# Altium PCB ASIC-Board.PcbDoc
Units mm, origin at the board's own origin, x right, y up, seen from the top; angles counter-clockwise.
Board outline 63 x 51 mm, 2 copper layers (Top Layer, Bottom Layer), stack 1.62 mm thick; 32 components, 24 nets, 136 pads, 62 vias.
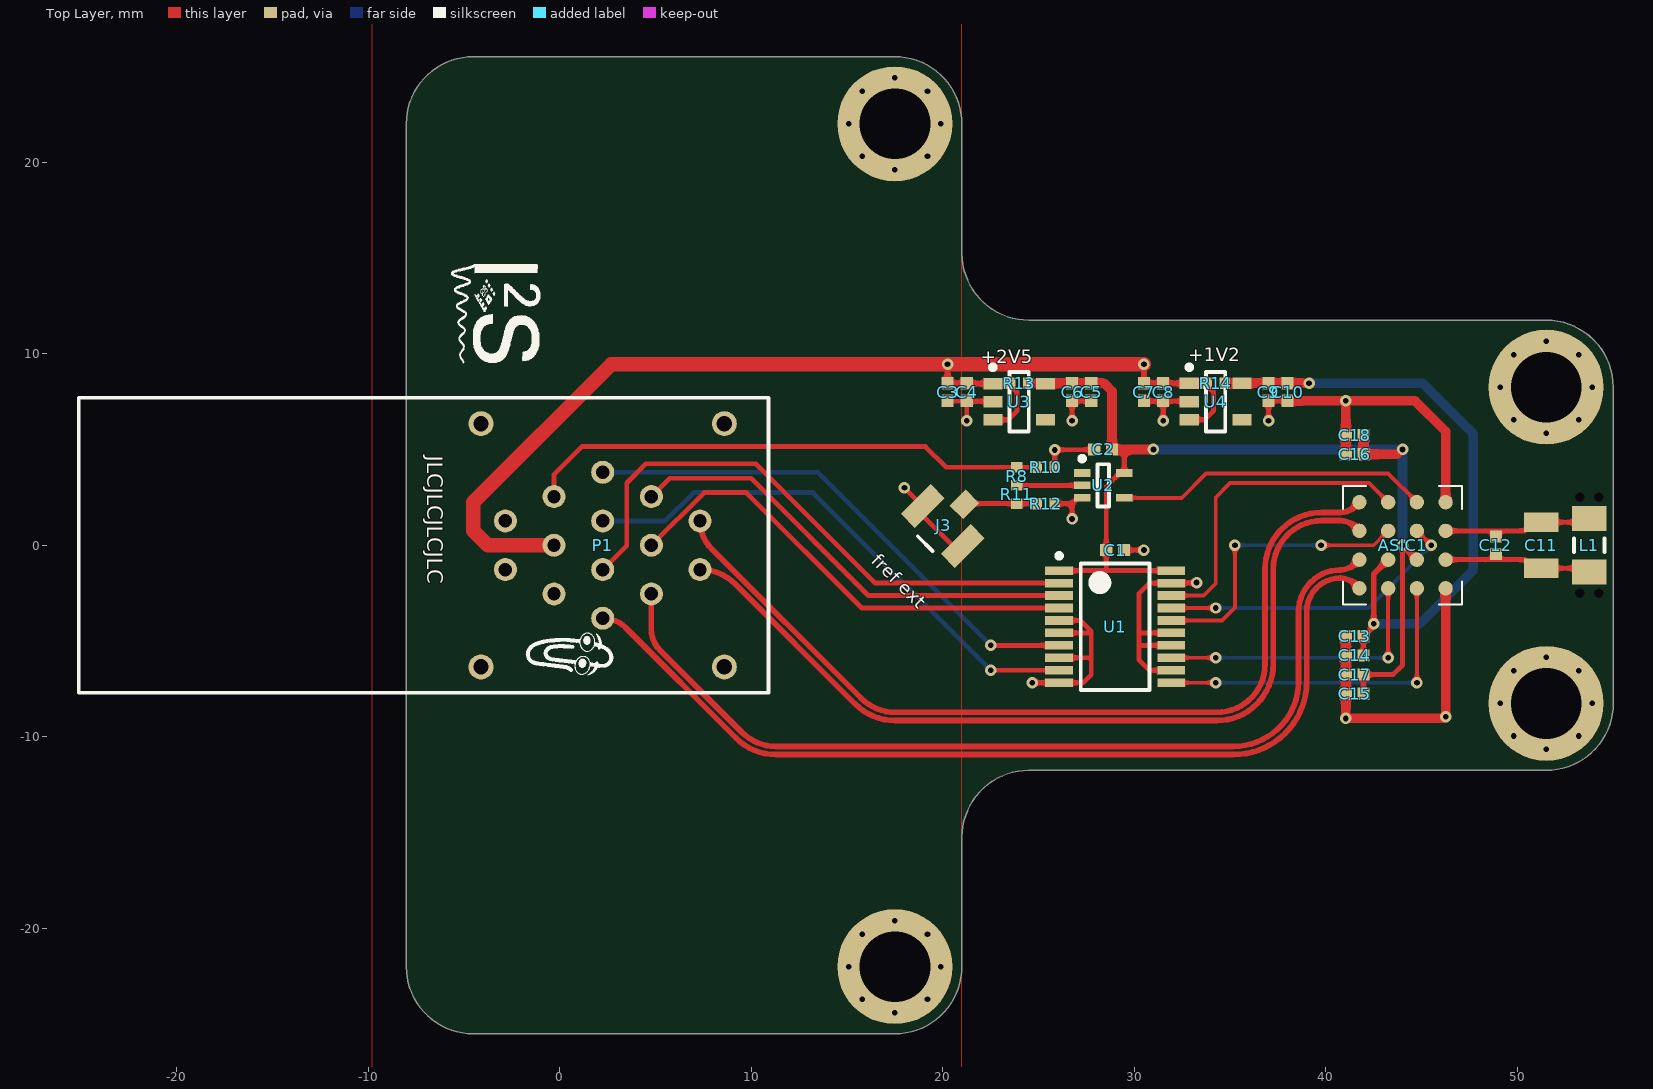
[diagram p0: Top Layer view]
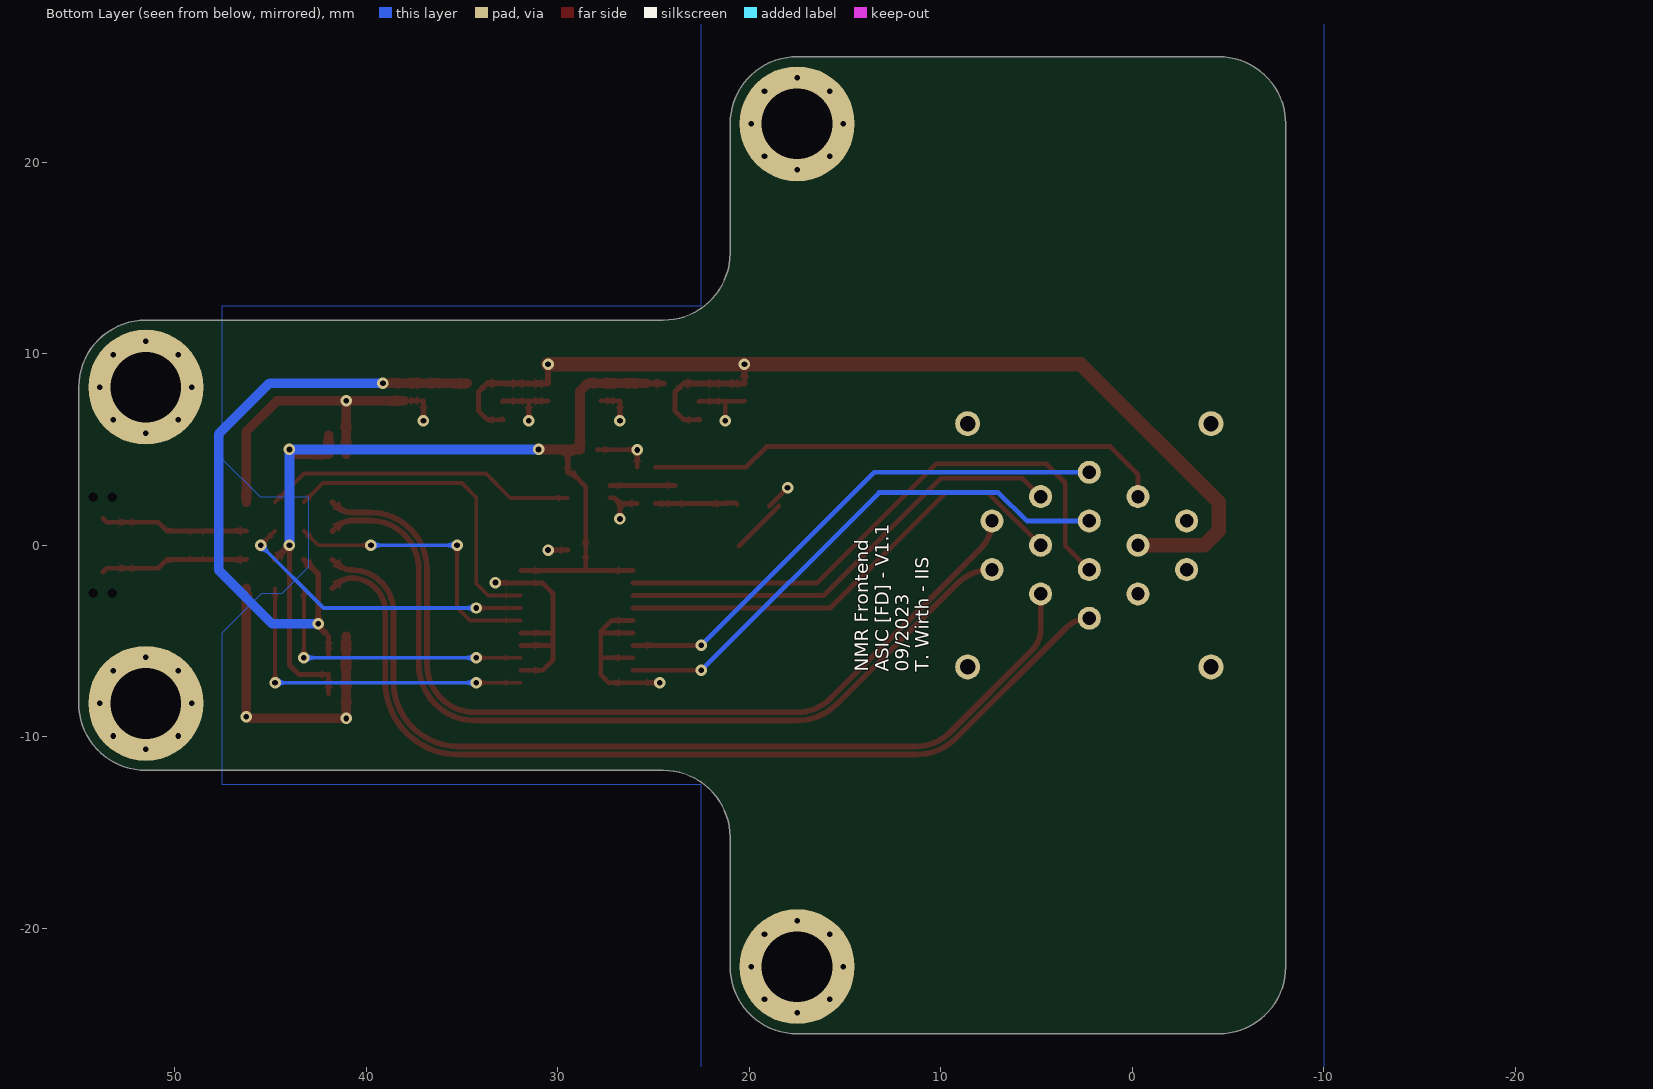
[diagram p1: Bottom Layer view, seen from below]
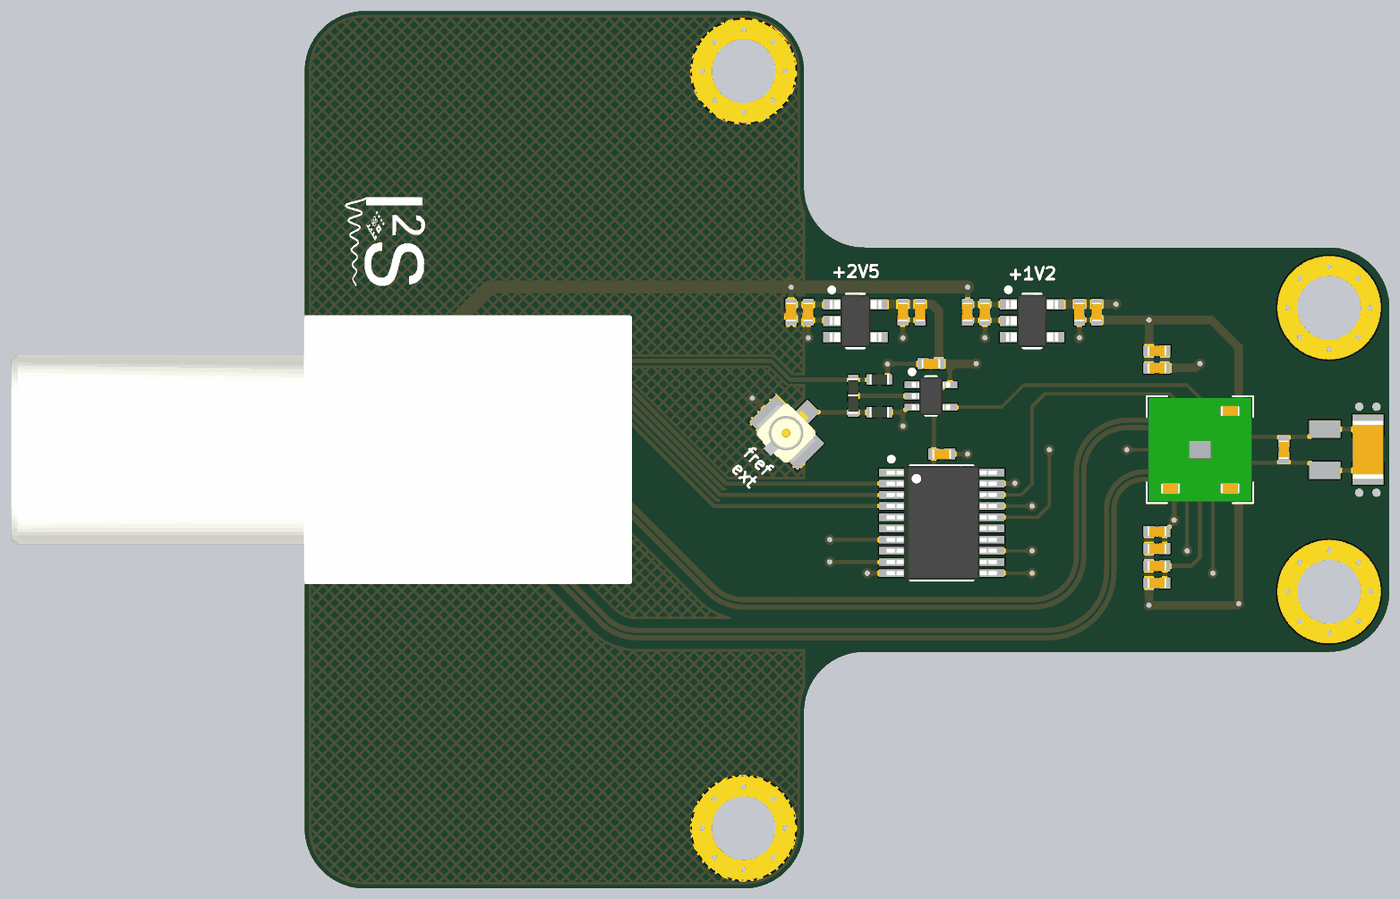
[diagram p2: 3D render of the assembled board from above, using the file's embedded part models]

## Layer stack, top to bottom
Top Solder: solder mask 0.01, Solder Resist, Dk 3.5
Top Layer: signal copper 0.035
Dielectric 1: dielectric 1.55, FR-4, Dk 4.8
Bottom Layer: signal copper 0.035
Bottom Solder: solder mask 0.01, Solder Resist, Dk 3.5

## Board outline
-4.5,-25.5 cw(c-4.5,-22) -8,-22 -8,22 cw(c-4.5,22) -4.5,25.5 17.5,25.5 cw(c17.5,22) 21,22 21,15.75 21,15.25 ccw(c24.5,15.25) 24.5,11.75 51.5,11.75 cw(c51.5,8.25) 55,8.25 55,-8.25 cw(c51.5,-8.25) 51.5,-11.75 24.5,-11.75 ccw(c24.5,-15.25) 21,-15.25 21,-15.75 21,-22 cw(c17.5,-22) 17.5,-25.5

## Design rules (kind name [scope] priority, off if disabled: settings)
BoardOutlineClearance [All] p1: gap=0.2 ignorepadtopadclearanceinfootprint=FALSE
Clearance Clearance_IQ [InNetClass('Diffnets')] p1: gap=0.127 ignorepadtopadclearanceinfootprint=FALSE except(0.25: Arc-Hole Track-Hole SMDPad-Hole THPad-Hole Via-Hole Fill-Hole Poly-Hole Region-Hole Text-Hole; 0.5: Arc-Poly Track-Poly SMDPad-Poly THPad-Poly Via-Poly)
Clearance [All] p2: gap=0.127 ignorepadtopadclearanceinfootprint=FALSE except(0.25: Arc-Hole Track-Hole SMDPad-Hole THPad-Hole Via-Hole Fill-Hole Poly-Hole Region-Hole Text-Hole)
ComponentClearance [All] p1: gap=0.127 collisioncheckmode=3 verticalgap=0.127 showdistances=TRUE
DiffPairsRouting DiffPairsRouting_IQ [InDifferentialPairClass('IQ')] p1: maxlimit=0.254 minlimit=0.127 mostfreqgap=0.127 toplayer_minwidth=0.127 toplayer_maxwidth=25.4 toplayer_prefwidth=0.3 bottomlayer_minwidth=0.127 bottomlayer_maxwidth=25.4 bottomlayer_prefwidth=0.3 maxuncoupledlength=12.7
DiffPairsRouting [All] p2: maxlimit=0.254 minlimit=0.127 mostfreqgap=0.127 toplayer_minwidth=0.127 toplayer_maxwidth=25.4 toplayer_prefwidth=0.127 bottomlayer_minwidth=0.127 bottomlayer_maxwidth=25.4 bottomlayer_prefwidth=0.127 maxuncoupledlength=12.7
Height [All] p1: minheight=0 maxheight=1816.048 prefheight=12.7
HoleSize [All] p1: absolutevalues=TRUE maxlimit=6.3 minlimit=0.3 maxpercent=80.000 minpercent=20.000
HoleToHoleClearance [All] p1: gap=0.25 allowstackedmicrovias=FALSE
MinimumAnnularRing [All] p1: minimumring=0.076
MinimumSolderMaskSliver [All] p1: minsoldermaskwidth=0
PlaneClearance [All] p1: clearance=0.2
PlaneConnect PlaneConnectPowerPads [InPadClass('PowerPads')] p1: planeconnectstyle=Direct reliefexpansion=0.508 reliefentries=4 reliefconductorwidth=0.254 reliefairgap=0.254
PlaneConnect [All] p2: planeconnectstyle=Direct reliefexpansion=0.3 reliefentries=4 reliefconductorwidth=0.127 reliefairgap=0.127
PolygonConnect PolygonConnectPowerPads [All vs (InPadClass('PowerPads'))] p1: connectstyle=Direct reliefconductorwidth=0.254 reliefentries=4 polygonreliefangle="90 Angle" airgapwidth=0.254
PolygonConnect [All] p2: connectstyle=Direct reliefconductorwidth=0.127 reliefentries=4 polygonreliefangle="90 Angle" airgapwidth=0.127
RoutingVias [All] p1: holewidth=0.3 width=0.6 viastyle="Through Hole" minholewidth=0.3 minwidth=0.6 maxholewidth=0.6 maxwidth=6.6
SilkToSilkClearance [All] p1: silktosilkclearance=0
SilkToSolderMaskClearance [IsPad] p1: minsilkscreentomaskgap=0.127 clearancetoexposedcopper=TRUE
SolderMaskExpansion [All] p1: expansion=0.075 istentingtop=FALSE
Width [All] p1: maxlimit=25.4 minlimit=0.127 preferedwidth=0.127 minimp=50.000000 maximp=50.000000 favimp=50.000000
20 further rules are at their usual default settings.

## Classes and differential pairs
net class Diffnets: I_N I_P Q_N Q_P
differential pair class IQ: I Q
component class U_Power: C3 C4 C5 C6 C7 C8 C9 C10 R13 R14 U3 U4
component class U_ASIC: ASIC1 C11 C12 C13 C14 C15 C16 C17 C18 L1
component class ASIC-Board: C1 C2 J3 P1 R8 R10 R11 R12 U1 U2
differential pair Q: +Q_P -Q_N
differential pair I: +I_P -I_N

## Components (designator, comment, footprint, x,y, rotation, side; value= is the part's Value field where it differs from the comment)
ASIC1 "NMR-Transceiver-v2_FD2020" NMR-Transceiver-FD2020_Interposer-BGA 44,0 r180 top
C1 "100n" CAP_0402 29,-0.25 r0 top
C2 "100n" CAP_0402 28.375,5 r180 top
C3 "1u" CAP_0402 20.25,8 r270 top
C4 "100n" CAP_0402 21.25,8 r270 top
C5 "100n" CAP_0402 27.75,8 r270 top
C6 "1u" CAP_0402 26.75,8 r270 top
C7 "1u" CAP_0402 30.5,8 r270 top
C8 "100n" CAP_0402 31.5,8 r270 top
C9 "100n" CAP_0402 37,8 r270 top
C10 "1u" CAP_0402 38,8 r270 top
C11 "JR500" Cap_var 51.25,-0.15 r90 top
C12 "Ct" CAP_0402 48.875,0 r90 top
C13 "100n" CAP_0402 41.5,-4.75 r180 top
C14 "1n" CAP_0402 41.5,-5.75 r180 top
C15 "1n" CAP_0402 41.5,-7.75 r180 top
C16 "1n" CAP_0402 41.5,4.75 r180 top
C17 "100n" CAP_0402 41.5,-6.75 r180 top
C18 "100n" CAP_0402 41.5,5.75 r180 top
J3 "U.FL" U.FL 20,1 r45 top
L1 "solenoid" Ind_1206 53.75,0 r90 top
P1 "EPG.1B.314.NLN" EPG.1B.314.NLN 2.25,0 r180 top
R8 "0 | inf" RES_0402 23.875,3.6 r90 top value="0 [] inf"
R10 "69R8" RES_0402 25.375,4.075 r180 top
R11 "0 | inf" RES_0402 23.875,2.65 r270 top value="0 [] inf"
R12 "49R9" RES_0402 25.375,2.175 r180 top
R13 "0" RES_0402 24,8.45 r0 top
R14 "0" RES_0402 34.25,8.45 r0 top
U1 "BusTransceiver" TSSOP-20 29,-4.25 r0 top
U2 "NC7SV04P5X" SOT23-65P210X110-5N 28.375,3.125 r0 top
U3 "LDLN025M25R" SOT23-95P280X145-5N 23.99,7.49 r0 top
U4 "LDLN025M12R" SOT23-95P280X145-5N 34.245,7.495 r0 top

## Footprints (in the part's own frame and the unit in brackets; to place one, negate y for a bottom-side part, rotate by r counter-clockwise, add the part's x,y. Pads: shape width x height; smd on the part's side, far side on the other; paste and mask are expansions set on the pad)
CAP_0402 [mm] "Chip Capacitor, 2-Leads, Body 1,00x0,50mm, IPC Medium Density"
  rect 0.64x0.64 smd: 1(-0.46,0) 2(0.46,0)
  body extent -0.55,-0.3 0.55,0.3, height 0.6
Cap_var [mm]
  rect 1x1.8 smd mask+0.102: 1(-1.05,0) 2(1.35,0)
  body extent -1.3,-1.2 1.7,1.2, height 0.75
EPG.1B.314.NLN [mil]
  round 47.24 hole 27.56: 1(-200,-50) 2(-100,-100) 3(0,-150) 4(100,-100) 5(200,-50) 6(200,50) 7(100,100) 8(0,150) 9(-100,100) 10(-200,50) 11(-100,0) 12(0,-50) 13(100,0) 14(0,50)
  round 51.18 hole 31.5: 15(-250,-250) 16(250,-250) 17(250,250) 18(-250,250)
  silkscreen extent -341,-303 1077,303, body extent -343,-303 1075,303, height 554
Ind_1206 [mm]
  rect 1.3x1.8 smd: 1(-1.4,0) 2(1.4,0)
  silkscreen extent -0.35,-0.8 0.35,0.8, body extent -1.7,-0.9 1.7,0.9, height 1.5
NMR-Transceiver-FD2020_Interposer-BGA [mm]
  round 0.75 smd mask+0: 1(-2.25,0.75) 4(-2.25,-0.75) 5(-0.75,0.75) 6(-2.25,2.25) 6(-2.25,-2.25) 7(-0.75,-2.25) 8(0.75,-2.25) 9(-0.75,-0.75) 10(0.75,-0.75) 12(2.25,-2.25) 13(2.25,-0.75) 14(2.25,0.75) 15(2.25,2.25) 16(0.75,0.75) 18(0.75,2.25) 19(-0.75,2.25)
  round 0.75 on Mech1 mask+0: 2(0,0) 3(0,0) 11(0,0) 17(0,0) 20(0,0) 21(0,0)
  silkscreen extent -3.1,-3.1 3.1,3.1, body extent -3,-3 3,3, height 1.9
RES_0402 [mm] "Chip Resistor, 2-Leads, Body 1,05x0,54mm, IPC Medium Density"
  rect 0.55x0.6 smd: 1(-0.475,0) 2(0.475,0)
  body extent -0.55,-0.3 0.55,0.3, height 0.4
SOT23-65P210X110-5N [mm] "SOT23, 5-Leads, Body 2,00x2,10mm, Pitch 0,65mm, IPC Medium Density"
  rect 0.85x0.4 smd: 1(-1.1,0.65) 2(-1.1,0) 3(-1.1,-0.65) 4(1.1,-0.65) 5(1.1,0.65)
  silkscreen extent -1.22,-1.1 0.3,1.52, body extent -1.15,-1.1 1.15,1.1, height 1.1
SOT23-95P280X145-5N [mm] "SOT23, 5-Leads, Body 2,90x2,80mm, Pitch 0,95mm, IPC Medium Density"
  rect 1x0.6 smd: 1(-1.375,0.95) 2(-1.375,0) 3(-1.375,-0.95) 4(1.375,-0.95) 5(1.375,0.95)
  silkscreen extent -1.5,-1.55 0.5,1.92, body extent -1.5,-1.53 1.5,1.53, height 1.45
TSSOP-20 [mm] "TSOP, 20-Leads, Body 6,50x4,35mm, Pitch 0,65mm, IPC Medium Density"
  rect 1.45x0.45 smd: 1(-2.925,2.925) 2(-2.925,2.275) 3(-2.925,1.625) 4(-2.925,0.975) 5(-2.925,0.325) 6(-2.925,-0.325) 7(-2.925,-0.975) 8(-2.925,-1.625) 9(-2.925,-2.275) 10(-2.925,-2.925) 11(2.925,-2.925) 12(2.925,-2.275) 13(2.925,-1.625) 14(2.925,-0.975) 15(2.925,-0.325) 16(2.925,0.325) 17(2.925,0.975) 18(2.925,1.625) 19(2.925,2.275) 20(2.925,2.925)
  silkscreen extent -3.05,-3.3 1.8,3.82, body extent -3.2,-3.3 3.2,3.3, height 1.2
U.FL [mm]
  rect 2.2x1.05 smd: 1(0,-1.475) 2(0,1.475)
  rect 1.2x1 smd: 3(1.6,0)
  silkscreen extent -1.3,-0.55 -1.3,0.55, body extent -1.6,-1.5 1.5,1.5, height 1.24

## Part data
C1 C2 C3 C4 C5 C6 C7 C8 C9 C10 C12 C13 C14 C15 C16 C17 C18: library part Cap
C11: library part Cap_var
L1: library part Ind
P1: "LEMO Connector - 14 pin EPG.1B.314.NLN Elbow receptacle for printed circuit (solder mount), Female Contact Drawing Rev. 00 Source: http://www.lemo.com/catalog/ROW/UK_English/unipole_multipole.pdf"
R8 R10 R11 R12 R13 R14: library part Res
  R13 R14: Note=DNP
U1: library part 74LVC245A
U3 U4: library part LDLN025MxxR

## Free pads (board coordinates)
  round 6 hole 3.7 mask+0.102: 0(17.5,-22) 0(17.5,22) 0(51.5,-8.25) 0(51.5,8.25)
  round 0 hole 0.5 unplated mask+0.102: 0(53.25,2.5) 2(54.25,2.5) 3(54.25,-2.5) 4(53.25,-2.5)

## Via types
v1: diameter 0.6, hole 0.3, Top Layer to Bottom Layer, tented both sides, 62 vias

## Nets (pads, with @x,y where several pads share a name; then routed paths per layer and width w, separated by ;. In a path a pad name is that pad's centre, name@x,y a point inside that pad or via, vN(x,y) a via of type N, cw(c..) or ccw(c..) an arc to the next point about the centre after c; other vN are vias at no path point)
+1V2: ASIC1.16 C9.1 C10.1 C13.1 C14.1 R14.2 U4.5 | length 33.1
  Top Layer w0.25: C14.1 C13.1 42.433,-4.277 42.433,-4.167 v1(42.5,-4.1)
  Top Layer w0.3: v1(42.5,-4.1) 42.5,-1.5 ASIC1.16
  Top Layer w0.5: R14.2 U4.5@35.625,8.45 ; U4.5@35.63,8.455 35.635,8.46 C10.1 v1(39.122,8.46)
  Bottom Layer w0.5: v1(39.122,8.46) 45.04,8.46 47.7,5.8 47.7,-1.3 44.9,-4.1 v1(42.5,-4.1)
+2V5: ASIC1.5 C1.1 C2.1 C5.1 C6.1 C15.1 C16.1 C17.1 C18.1 R13.2 U1.1 U1.20 U2.5 U3.5 | length 54.2
  Top Layer w0.25: U1.1 28.5,-1.325 ; 29.475,5 U2.5 29.25,3.775 28.54,3.065 C1.1 28.54,-1.285 28.5,-1.325 ; U1.20 28.5,-1.325 ; C15.1 C17.1 43.5,-6.75 44,-6.25 v1(44,0)
  Top Layer w0.3: R13.2 25.375,8.45 U3.5@25.38,8.455 ; C5.1@27.745,8.455 C5.1 ; v1(44,0) ASIC1.5
  Top Layer w0.5: U3.5@25.38,8.455 C5.1@27.745,8.455 ; C5.1 28.415,8.46 28.835,8.04 C2.1 29.475,5 v1(31,5) ; C18.1 C16.1 43.723,4.75 43.973,5 v1(44,5)
  Bottom Layer w0.5: v1(31,5) v1(44,5) v1(44,0)
+5V: C3.1 C4.1 C7.1 C8.1 P1.13 R13.1 R14.1 U3.1 U3.3 U4.1 U4.3 | length 58.6
  Top Layer w0.25: U3.3@22.625,6.55 23.425,6.55 23.875,7 23.875,8 R13.1@23.425,8.45 ; U4.3@32.88,6.555 33.68,6.555 34.13,7.005 34.13,8.005 R14.1@33.68,8.455
  Top Layer w0.3: v1(20.25,9.45) C3.1 20.25,8.44 U3.1 22.625,8.45 R13.1@23.425,8.45 ; U3.3@22.625,6.55 U3.3@22.645,6.57 ; v1(30.505,9.455) 30.502,9.452 30.502,8.448 30.505,8.445 U4.1 32.88,8.455 R14.1@33.68,8.455 ; U4.3@32.88,6.555 U4.3@32.9,6.575
  Top Layer w0.75: P1.13 -3.75,0 -4.5,0.75 -4.5,2.25 2.705,9.455 20.25,9.455 v1(30.505,9.455)
CE_in: P1.2 U1.3 | length 24.2
  Top Layer w0.25: P1.2 5.75,3.5 10,3.5 16.125,-2.625 U1.3
CE_out: ASIC1.9 U1.17 | length 16
  Top Layer w0.2: U1.17 v1(34.25,-3.275) ; ASIC1.9 v1(45.5,0)
  Bottom Layer w0.2: v1(34.25,-3.275) 42.225,-3.275 v1(45.5,0)
CLK_in: P1.14 U1.2 | length 30.6
  Top Layer w0.25: P1.14 3.5,-0.02 3.5,3.25 4.5,4.25 10.25,4.25 16.475,-1.975 U1.2
CLK_out: ASIC1.8 U1.18 | length 16.8
  Top Layer w0.2: U1.18 33.625,-2.625 34.25,-2 34.25,2.5 35,3.25 42.25,3.25 ASIC1.8
fref: P1.4 R8.2 R10.2 | length 27.4
  Top Layer w0.25: P1.4 -0.29,3.71 1.154,5.154 19.096,5.154 20.175,4.075 R8.2 R10.2
fref_ASIC: ASIC1.7 U2.4 | length 16.4
  Top Layer w0.2: U2.4 32.475,2.475 33.75,3.75 43.25,3.75 ASIC1.7
fref_coax: J3.3 R11.2 R12.2 | length 4.3
  Top Layer w0.25: J3.3@20.631,2.131 20.702,2.202 21.232,2.202 21.259,2.175 R12.2
GND: ASIC1.6 C1.2 C2.2 C3.2 C4.2 C5.2 C6.2 C7.2 C8.2 C9.2 C10.2 C13.2 C14.2 C15.2 C16.2 C17.2 C18.2 J3.1 J3.2 P1.5 P1.6 P1.7 P1.15 P1.16 P1.17 P1.18 pad.0@17.5,22 pad.0@17.5,-22 R10.1 R12.1 U1.5 U1.6 U1.8 U1.10 U1.12 U1.14 U1.15 U1.19 U2.3 U3.2 U4.2 | length 76.1
  Top Layer w0.25: v1(18,3) J3.2 ; J3.2@18.457,2.043 J3.1@20.543,-0.043 ; C3.2 20.27,7.52 C4.2@21.25,7.52 ; v1(21.25,6.5) C4.2@21.25,7.52 ; C4.2 C4.2@21.25,7.52 ; U3.2@22.625,7.5 22.605,7.52 C4.2@21.25,7.52 ; v1(24.675,-7.175) U1.10 27.325,-7.175 27.75,-6.75 27.75,-6 ; R12.1 26.75,2.175 ; R10.1 v1(25.85,4.975) 25.862,4.987 27.902,4.987 C2.2 ; U1.8 27.625,-5.875 27.75,-6 ; U1.6 27.675,-4.575 27.75,-4.5 ; U1.5 27.175,-3.925 27.75,-4.5 ; v1(26.75,1.375) 26.75,2.175 ; v1(26.75,6.5) C6.2 C5.2 ; U2.3 27.05,2.475 26.75,2.175 ; C1.2 v1(30.5,-0.25) ; C7.2@30.505,7.545 30.525,7.525 C8.2@31.505,7.525 ; v1(31.505,6.505) C8.2@31.505,7.525 ; C8.2@31.505,7.545 C8.2@31.505,7.525 ; U1.12 30.775,-6.525 30.25,-6 30.25,-5.25 ; U1.14 30.275,-5.225 30.25,-5.25 ; U1.15 30.325,-4.575 30.25,-4.5 ; U4.2@32.88,7.505 32.86,7.525 C8.2@31.505,7.525 ; v1(33.25,-1.95) 33.238,-1.962 31.938,-1.962 U1.19 30.775,-1.975 30.25,-2.5 30.25,-4.5 ; v1(37.005,6.505) 37.005,7.545 C10.2@38.005,7.545 ; 27.75,-6 27.75,-4.5 ; 30.25,-5.25 30.25,-4.5
  Top Layer w0.5: C10.2 v1(41.04,7.54) ; C13.2 C14.2 C17.2 C15.2 v1(41.04,-9.04) 46.133,-9.04 46.223,-8.95 v1(46.25,-8.95) ASIC1.6@46.25,-2.25 ; C16.2 v1(41.04,7.54) ; ASIC1.6@46.25,2.25 46.25,5.95 44.66,7.54 v1(41.04,7.54)
  other v1: 17.5,-24.4 15.8,-23.7 19.2,-23.7 15.1,-22 19.9,-22 15.8,-20.3 19.2,-20.3 17.5,-19.6 17.5,19.6 15.8,20.3 19.2,20.3 15.1,22 19.9,22 15.8,23.7 19.2,23.7 17.5,24.4
I_N: ASIC1.15 P1.8 | length 49.2
  Top Layer w0.3: P1.8 cw(c2.25,-5.515) 3.455,-4.309 9.204,-10.058 ccw(c11.302,-7.96) 11.302,-10.927 19.725,-10.927 35.179,-10.927 ccw(c35.179,-7.106) 39,-7.106 39,-3.463 cw(c40.75,-3.463) 40.75,-1.713 cw(c40.75,-2.832) 41.541,-2.041 ASIC1.15
I_P: ASIC1.14 P1.9 | length 48.5
  Top Layer w0.3: P1.9 4.79,-4.389 ccw(c6.361,-4.389) 5.25,-5.5 9.506,-9.756 ccw(c11.302,-7.96) 11.302,-10.5 19.725,-10.5 35.179,-10.5 ccw(c35.179,-7.106) 38.573,-7.106 38.573,-3.463 cw(c40.75,-3.463) 40.75,-1.286 ccw(c40.75,-0.168) 41.541,-0.959 ASIC1.14
MOSI_in: P1.11 U1.4 | length 24.9
  Top Layer w0.25: P1.11 7.54,2.75 9.75,2.75 15.775,-3.275 U1.4
MOSI_out: ASIC1.10 U1.16 | length 15.2
  Top Layer w0.2: U1.16 34.575,-3.925 35.25,-3.25 v1(35.25,0) ; v1(39.75,0) 42.5,0 ASIC1.10
  Bottom Layer w0.2: v1(35.25,0) v1(39.75,0)
NetASIC1_1: ASIC1.1 C11.1 C12.1 L1.1 | length 7.8
  Top Layer w0.25: ASIC1.1 50.4,-0.75 50.85,-1.2 C11.1 53.55,-1.2 L1.1
NetASIC1_3: ASIC1.4 C11.2 C12.2 L1.2 | length 7.8
  Top Layer w0.25: ASIC1.4 50.4,0.75 50.85,1.2 C11.2 53.55,1.2 L1.2
NetR8_1: R8.1 R11.1 U2.2 | length 3.4
  Top Layer w0.25: R8.1 U2.2
Q_N: ASIC1.12 P1.1 | length 47.1
  Top Layer w0.3: P1.1 ccw(c9.382,1.27) 7.931,-0.181 15.729,-7.979 ccw(c17.525,-6.183) 17.525,-8.723 34.31,-8.723 ccw(c34.31,-6.21) 36.823,-6.21 36.823,-1.253 cw(c39.79,-1.253) 39.79,1.714 40.75,1.714 ccw(c40.75,2.832) 41.541,2.041 ASIC1.12
Q_P: ASIC1.13 P1.10 | length 45.7
  Top Layer w0.3: P1.10 7.364,-1.27 cw(c7.364,-3.81) 9.16,-2.014 15.427,-8.281 ccw(c17.525,-6.183) 17.525,-9.15 34.31,-9.15 ccw(c34.31,-6.21) 37.25,-6.21 37.25,-1.253 cw(c39.79,-1.253) 39.79,1.287 40.75,1.287 cw(c40.75,0.168) 41.541,0.959 ASIC1.13
RX_in: P1.3 U1.7 | length 27.6
  Top Layer w0.25: v1(22.5,-5.225) U1.7
  Bottom Layer w0.25: P1.3 13.465,3.81 v1(22.5,-5.225)
RX_out: ASIC1.18 U1.13 | length 14.9
  Top Layer w0.2: U1.13 v1(34.25,-5.875) ; v1(43.25,-5.875) ASIC1.18
  Bottom Layer w0.2: v1(34.25,-5.875) v1(43.25,-5.875)
TX_in: P1.12 U1.9 | length 28.3
  Top Layer w0.25: v1(22.5,-6.525) U1.9
  Bottom Layer w0.25: P1.12 5.52,1.27 7,2.75 13.225,2.75 v1(22.5,-6.525)
TX_out: ASIC1.19 U1.11 | length 17.7
  Top Layer w0.2: U1.11 v1(34.25,-7.175) ; v1(44.75,-7.175) ASIC1.19
  Bottom Layer w0.2: v1(34.25,-7.175) v1(44.75,-7.175)
pads on no net: ASIC1.2 ASIC1.3 ASIC1.11 ASIC1.17 ASIC1.20 ASIC1.21 U2.1 U3.4 U4.4
copper on no net:
  other v1: 51.5,-10.65 49.8,-9.95 53.2,-9.95 49.1,-8.25 53.9,-8.25 49.8,-6.55 53.2,-6.55 51.5,-5.85 51.5,5.85 49.8,6.55 53.2,6.55 49.1,8.25 53.9,8.25 49.8,9.95 53.2,9.95 51.5,10.65

## Polygon pours and split planes (outlines as drawn)
GND on Bottom Layer "NONET_L-01_P-001" (hatched 45Degree grid 0.5 track 0.15, remove dead copper, shelved, pour order 1): 22.5,12.5 22.5,27.5 -10,27.5 -10,-27.5 22.5,-27.5 22.5,-12.5 47.5,-12.5 47.5,-4.563 45.437,-2.5 44.375,-2.5 43,-1.125 43,2.5 45.5,2.5 47.5,4.5 47.5,12.5
GND on Top Layer "NONET_L-01_P-001" (hatched 45Degree grid 0.5 track 0.15, remove dead copper, shelved, pour order 0): 21,27.342 -9.805,27.342 -9.805,-27.658 21,-27.658

## Silkscreen, mask and mechanical layers (free items; w line width, h text height)
Top Overlay:
  drawing of 14 lines, arcs and shapes, not listed
  text "+1V2" at 32.827,9.61 h0.7
  text "+2V5" at 21.994,9.493 h0.7
  text "JLCJLCJLCJLC" at -6.9,4.665 h0.8 r270
  text "fref ext" at 16.214,-0.856 h0.7 r315
Bottom Overlay:
  text "NMR Frontend / ASIC [FD] - V1.1 / 09/2023 / T. Wirth - IIS" at 10.63,-6.605 h0.7 r270
Outline:
  the board outline again, w0.1